# EAGLE board avoccado-nora2-test-jig-panel (EAGLE 7.2.0)
Avoccado-avr-yolandi Yolandi is the minified version of Avoccado-avr with less pins broken out and a footprint of less than one square inch for the PCB without peripherals.
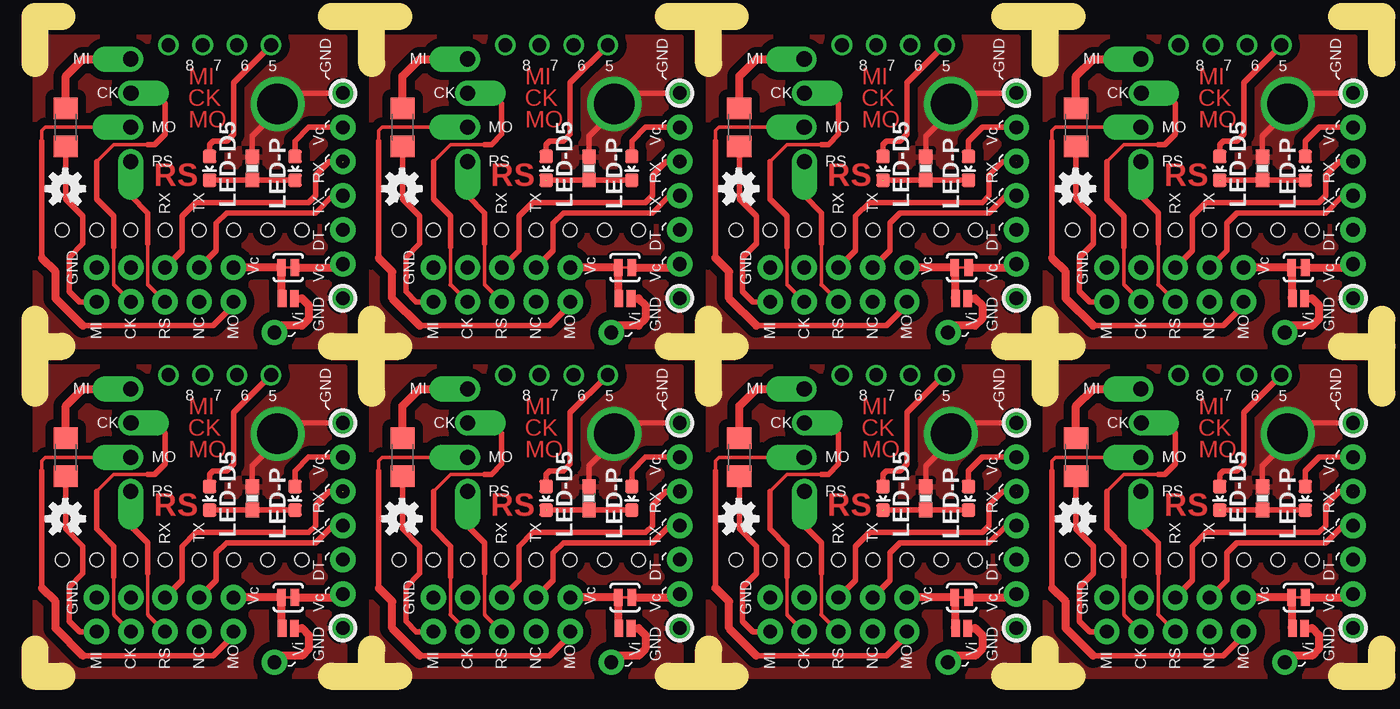
[diagram p0: board, top side]
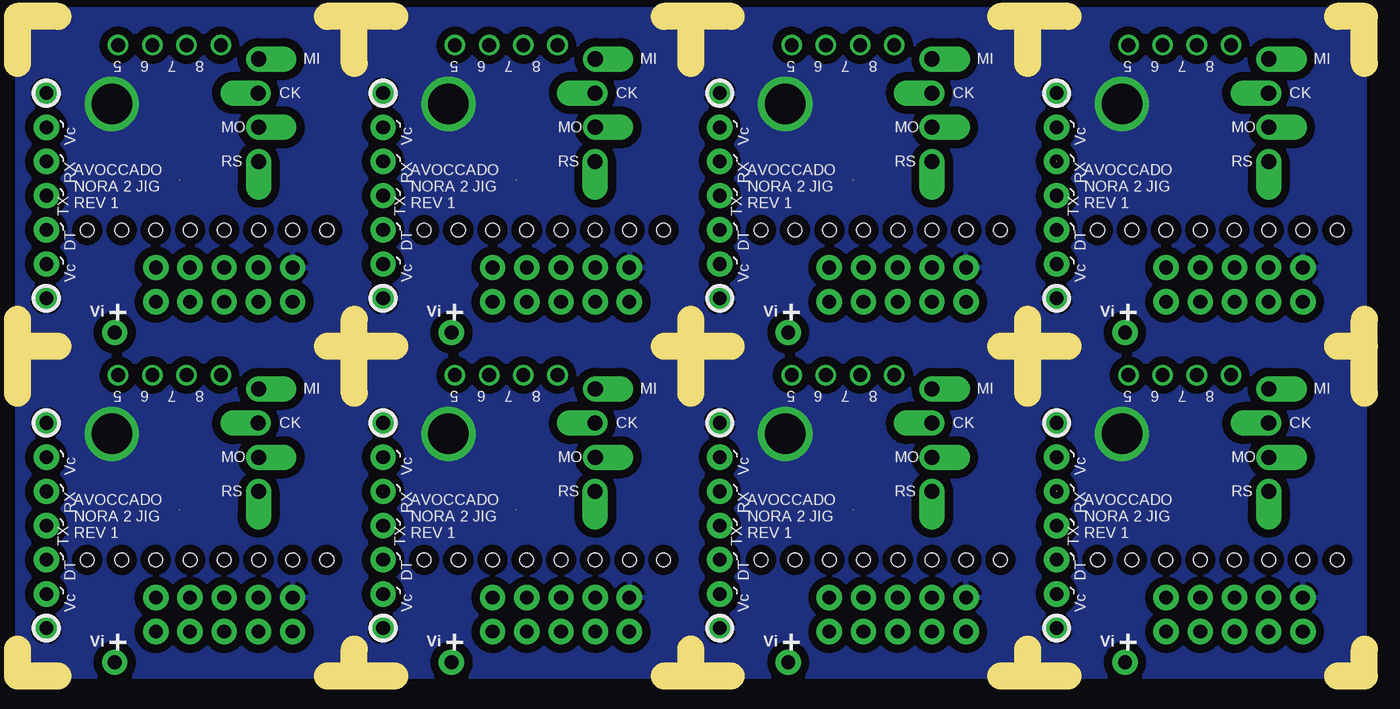
[diagram p1: board, bottom side, seen from below]

No outline drawn. Coordinates in mm, seen from the top.
Copper layers (1*16): Top 0.035mm / dielectric 1.5mm / Bottom 0.035mm
Design rules "dirt_cheap_dirty_boards.v1 *": minimum track width 5mil, minimum drill 12mil, track to track 5mil, track to pad 5mil, pad to pad 5mil, via to via 5mil, smd to smd 0mil, copper to edge 10mil, drill to drill 10mil, minimum pad ring 10mil, minimum via ring 6mil, stop-mask expansion 0mil, vias tented up to drill 25mil, thermal gap 10mil
Net classes: 1 vcc: width 0.254 mm; 3 usbvcc: width 0.203 mm, drill 0.61 mm, clearance 0.152 mm
Holes 1.02 mm at 4.57,8.64 7.11,8.64 9.65,8.64 12.19,8.64 14.73,8.64 17.27,8.64 19.81,8.64 2.03,8.64 4.57,33.14 7.11,33.14 9.65,33.14 12.19,33.14 14.73,33.14 17.27,33.14 19.81,33.14 2.03,33.14 29.57,8.64 32.11,8.64 34.65,8.64 37.19,8.64 39.73,8.64 42.27,8.64 44.81,8.64 27.03,8.64 29.57,33.14 32.11,33.14 34.65,33.14 37.19,33.14 39.73,33.14 42.27,33.14 44.81,33.14 27.03,33.14 54.57,8.64 57.11,8.64 59.65,8.64 62.19,8.64 64.73,8.64 67.27,8.64 69.81,8.64 52.03,8.64 54.57,33.14 57.11,33.14 59.65,33.14 62.19,33.14 64.73,33.14 67.27,33.14 69.81,33.14 52.03,33.14 79.57,8.64 82.11,8.64 84.65,8.64 87.19,8.64 89.73,8.64 92.27,8.64 94.81,8.64 77.03,8.64 79.57,33.14 82.11,33.14 84.65,33.14 87.19,33.14 89.73,33.14 92.27,33.14 94.81,33.14 77.03,33.14
tRestrict: area 3,3 to 14.7,7.1; area 7.1,9.1 to 12.7,21.3; area 12.7,19.8 to 14.7,21.3; area 1.5,3.6 to 5.1,15.7; area 3,27.5 to 14.7,31.6; area 7.1,33.6 to 12.7,45.8; area 12.7,44.3 to 14.7,45.8; area 1.5,28.1 to 5.1,40.2; area 28,3 to 39.7,7.1; area 32.1,9.1 to 37.7,21.3; area 37.7,19.8 to 39.7,21.3; area 26.5,3.6 to 30.1,15.7; 20 more areas
Milling: 64 lines

## Footprints (pad centres in the part's own frame; a part is rotated, then mirrored left to right if it is on the bottom)
LED-0603 = smd 1 x 1: A 0,-0.877; C 0,0.877
2X5_NOSILK = drill 1.016 pad 1.88: 1 -1.27,5.08; 2 1.27,5.08; 3 -1.27,2.54; 4 1.27,2.54; 5 -1.27,0; 6 1.27,0; 7 -1.27,-2.54; 8 1.27,-2.54; 9 -1.27,-5.08; 10 1.27,-5.08
1X01 = drill 1.016 pad 1.88: 1 0,0
1X01_OFFSET = drill 1.118 pad 1.88 offset: 1 0,0
1206 = smd 1.6 x 1.8: 1 -1.4,0; 2 1.4,0
0603-RES = smd 1.1 x 1: 1 -0.85,0; 2 0.85,0
PAD-JUMPER-2-NC_BY_TRACE_YES_SILK = smd 0.635 x 1.27: 1 -0.508,0; 2 0.508,0
PAD-JUMPER-2-NO_NO_SILK = smd 0.635 x 1.27: 1 -0.45,0; 2 0.45,0
1X01NS-KIT = drill 1.016 pad 1.524: 1 0,0

## Placement (x,y rotation side)
D5-LED  [LED-0603]  12.95,13.21 180 top
D5-LED1  [LED-0603]  12.95,37.71 180 top
D5-LED2  [LED-0603]  37.95,13.21 180 top
D5-LED3  [LED-0603]  37.95,37.71 180 top
D5-LED4  [LED-0603]  62.95,13.21 180 top
D5-LED5  [LED-0603]  62.95,37.71 180 top
D5-LED6  [LED-0603]  87.95,13.21 180 top
D5-LED7  [LED-0603]  87.95,37.71 180 top
ICSP  M05X2NO_SILK  [2X5_NOSILK]  9.65,4.57 90 bottom
ICSP1  M05X2NO_SILK  [2X5_NOSILK]  9.65,29.07 90 bottom
ICSP2  M05X2NO_SILK  [2X5_NOSILK]  34.65,4.57 90 bottom
ICSP3  M05X2NO_SILK  [2X5_NOSILK]  34.65,29.07 90 bottom
ICSP4  M05X2NO_SILK  [2X5_NOSILK]  59.65,4.57 90 bottom
ICSP5  M05X2NO_SILK  [2X5_NOSILK]  59.65,29.07 90 bottom
ICSP6  M05X2NO_SILK  [2X5_NOSILK]  84.65,4.57 90 bottom
ICSP7  M05X2NO_SILK  [2X5_NOSILK]  84.65,29.07 90 bottom
JP1  M01PTH  [1X01]  22.86,28.06 0 top
JP2  M01PTH  [1X01]  22.86,38.22 0 top
JP3  M01PTH  [1X01]  22.86,18.8 0 top
JP4  M01PTH  [1X01]  22.86,35.68 0 top
JP5  M01PTH  [1X01]  22.86,33.14 0 top
JP6  M01PTH  [1X01]  22.86,3.56 0 top
JP7  M01PTH  [1X01]  22.86,40.76 0 top
JP8  M01PTH  [1X01]  22.86,13.72 0 top
JP9  M01PTH  [1X01]  22.86,11.18 0 top
JP10  M01PTH  [1X01]  22.86,8.64 0 top
JP11  M01PTH  [1X01]  22.86,16.26 0 top
JP12  M01OFFSET  [1X01_OFFSET]  7.1,21.34 90 top
JP13  M01OFFSET  [1X01_OFFSET]  7.12,18.8 270 top
JP14  M01OFFSET  [1X01_OFFSET]  7.1,16.26 90 top
JP15  M01OFFSET  [1X01_OFFSET]  7.11,13.71 180 top
JP16  M01OFFSET  [1X01_OFFSET]  7.1,45.84 90 top
JP17  M01PTH  [1X01]  17.78,1.02 0 top
JP18  M01PTH  [1X01]  22.86,6.1 0 top
JP19  M01OFFSET  [1X01_OFFSET]  7.12,43.3 270 top
JP20  M01OFFSET  [1X01_OFFSET]  7.1,40.76 90 top
JP21  M01OFFSET  [1X01_OFFSET]  7.11,38.21 180 top
JP22  M01PTH  [1X01]  22.86,43.3 0 top
JP23  M01PTH  [1X01]  17.78,25.52 0 top
JP24  M01PTH  [1X01]  22.86,30.6 0 top
JP25  M01PTH  [1X01]  47.86,3.56 0 top
JP26  M01PTH  [1X01]  47.86,13.72 0 top
JP27  M01PTH  [1X01]  47.86,11.18 0 top
JP28  M01PTH  [1X01]  47.86,8.64 0 top
JP29  M01PTH  [1X01]  47.86,16.26 0 top
JP30  M01OFFSET  [1X01_OFFSET]  32.1,21.34 90 top
JP31  M01OFFSET  [1X01_OFFSET]  32.12,18.8 270 top
JP32  M01OFFSET  [1X01_OFFSET]  32.1,16.26 90 top
JP33  M01OFFSET  [1X01_OFFSET]  32.11,13.71 180 top
JP34  M01PTH  [1X01]  47.86,18.8 0 top
JP35  M01PTH  [1X01]  42.78,1.02 0 top
JP36  M01PTH  [1X01]  47.86,6.1 0 top
JP37  M01PTH  [1X01]  47.86,28.06 0 top
JP38  M01PTH  [1X01]  47.86,38.22 0 top
JP39  M01PTH  [1X01]  47.86,35.68 0 top
JP40  M01PTH  [1X01]  47.86,33.14 0 top
JP41  M01PTH  [1X01]  47.86,40.76 0 top
JP42  M01OFFSET  [1X01_OFFSET]  32.1,45.84 90 top
JP43  M01OFFSET  [1X01_OFFSET]  32.12,43.3 270 top
JP44  M01OFFSET  [1X01_OFFSET]  32.1,40.76 90 top
JP45  M01OFFSET  [1X01_OFFSET]  32.11,38.21 180 top
JP46  M01PTH  [1X01]  47.86,43.3 0 top
JP47  M01PTH  [1X01]  42.78,25.52 0 top
JP48  M01PTH  [1X01]  47.86,30.6 0 top
JP49  M01PTH  [1X01]  72.86,3.56 0 top
JP50  M01PTH  [1X01]  72.86,13.72 0 top
JP51  M01PTH  [1X01]  72.86,11.18 0 top
JP52  M01PTH  [1X01]  72.86,8.64 0 top
JP53  M01PTH  [1X01]  72.86,16.26 0 top
JP54  M01OFFSET  [1X01_OFFSET]  57.1,21.34 90 top
JP55  M01OFFSET  [1X01_OFFSET]  57.12,18.8 270 top
JP56  M01OFFSET  [1X01_OFFSET]  57.1,16.26 90 top
JP57  M01OFFSET  [1X01_OFFSET]  57.11,13.71 180 top
JP58  M01PTH  [1X01]  72.86,18.8 0 top
JP59  M01PTH  [1X01]  67.78,1.02 0 top
JP60  M01PTH  [1X01]  72.86,6.1 0 top
JP61  M01PTH  [1X01]  72.86,28.06 0 top
JP62  M01PTH  [1X01]  72.86,38.22 0 top
JP63  M01PTH  [1X01]  72.86,35.68 0 top
JP64  M01PTH  [1X01]  72.86,33.14 0 top
JP65  M01PTH  [1X01]  72.86,40.76 0 top
JP66  M01OFFSET  [1X01_OFFSET]  57.1,45.84 90 top
JP67  M01OFFSET  [1X01_OFFSET]  57.12,43.3 270 top
JP68  M01OFFSET  [1X01_OFFSET]  57.1,40.76 90 top
JP69  M01OFFSET  [1X01_OFFSET]  57.11,38.21 180 top
JP70  M01PTH  [1X01]  72.86,43.3 0 top
JP71  M01PTH  [1X01]  67.78,25.52 0 top
JP72  M01PTH  [1X01]  72.86,30.6 0 top
JP73  M01PTH  [1X01]  97.86,3.56 0 top
JP74  M01PTH  [1X01]  97.86,13.72 0 top
JP75  M01PTH  [1X01]  97.86,11.18 0 top
JP76  M01PTH  [1X01]  97.86,8.64 0 top
JP77  M01PTH  [1X01]  97.86,16.26 0 top
JP78  M01OFFSET  [1X01_OFFSET]  82.1,21.34 90 top
JP79  M01OFFSET  [1X01_OFFSET]  82.12,18.8 270 top
JP80  M01OFFSET  [1X01_OFFSET]  82.1,16.26 90 top
JP81  M01OFFSET  [1X01_OFFSET]  82.11,13.71 180 top
JP82  M01PTH  [1X01]  97.86,18.8 0 top
JP83  M01PTH  [1X01]  92.78,1.02 0 top
JP84  M01PTH  [1X01]  97.86,6.1 0 top
JP85  M01PTH  [1X01]  97.86,28.06 0 top
JP86  M01PTH  [1X01]  97.86,38.22 0 top
JP87  M01PTH  [1X01]  97.86,35.68 0 top
JP88  M01PTH  [1X01]  97.86,33.14 0 top
JP89  M01PTH  [1X01]  97.86,40.76 0 top
JP90  M01OFFSET  [1X01_OFFSET]  82.1,45.84 90 top
JP91  M01OFFSET  [1X01_OFFSET]  82.12,43.3 270 top
JP92  M01OFFSET  [1X01_OFFSET]  82.1,40.76 90 top
JP93  M01OFFSET  [1X01_OFFSET]  82.11,38.21 180 top
JP94  M01PTH  [1X01]  97.86,43.3 0 top
JP95  M01PTH  [1X01]  92.78,25.52 0 top
JP96  M01PTH  [1X01]  97.86,30.6 0 top
LOGO1  OSHW-LOGOS  [OSHW-LOGO-S]  2.25,36.19 0 top
LOGO2  OSHW-LOGOS  [OSHW-LOGO-S]  2.25,11.69 0 top
LOGO3  OSHW-LOGOS  [OSHW-LOGO-S]  27.25,11.69 0 top
LOGO4  OSHW-LOGOS  [OSHW-LOGO-S]  27.25,36.19 0 top
LOGO5  OSHW-LOGOS  [OSHW-LOGO-S]  52.25,11.69 0 top
LOGO6  OSHW-LOGOS  [OSHW-LOGO-S]  52.25,36.19 0 top
LOGO7  OSHW-LOGOS  [OSHW-LOGO-S]  77.25,11.69 0 top
LOGO8  OSHW-LOGOS  [OSHW-LOGO-S]  77.25,36.19 0 top
PWR-LED  [LED-0603]  19.3,13.21 180 top
PWR-LED1  [LED-0603]  19.3,37.71 180 top
PWR-LED2  [LED-0603]  44.3,13.21 180 top
PWR-LED3  [LED-0603]  44.3,37.71 180 top
PWR-LED4  [LED-0603]  69.3,13.21 180 top
PWR-LED5  [LED-0603]  69.3,37.71 180 top
PWR-LED6  [LED-0603]  94.3,13.21 180 top
PWR-LED7  [LED-0603]  94.3,37.71 180 top
R1  0  [1206]  2.29,16.26 270 top
R2  1K  [0603-RES]  16.13,13.21 90 top
R3  0  [1206]  2.29,40.76 270 top
R4  1K  [0603-RES]  16.13,37.71 90 top
R5  0  [1206]  27.29,16.26 270 top
R6  1K  [0603-RES]  41.13,13.21 90 top
R7  0  [1206]  27.29,40.76 270 top
R8  1K  [0603-RES]  41.13,37.71 90 top
R9  0  [1206]  52.29,16.26 270 top
R10  1K  [0603-RES]  66.13,13.21 90 top
R11  0  [1206]  52.29,40.76 270 top
R12  1K  [0603-RES]  66.13,37.71 90 top
R13  0  [1206]  77.29,16.26 270 top
R14  1K  [0603-RES]  91.13,13.21 90 top
R15  0  [1206]  77.29,40.76 270 top
R16  1K  [0603-RES]  91.13,37.71 90 top
SJ1  JUMPER-PAD-2-NC_BY_TRACE  [PAD-JUMPER-2-NC_BY_TRACE_YES_SILK]  18.8,5.84 180 top
SJ2  JUMPER-PAD-2-NO  [PAD-JUMPER-2-NO_NO_SILK]  18.8,3.56 180 top
SJ3  JUMPER-PAD-2-NC_BY_TRACE  [PAD-JUMPER-2-NC_BY_TRACE_YES_SILK]  18.8,30.34 180 top
SJ4  JUMPER-PAD-2-NO  [PAD-JUMPER-2-NO_NO_SILK]  18.8,28.06 180 top
SJ5  JUMPER-PAD-2-NC_BY_TRACE  [PAD-JUMPER-2-NC_BY_TRACE_YES_SILK]  43.8,5.84 180 top
SJ6  JUMPER-PAD-2-NO  [PAD-JUMPER-2-NO_NO_SILK]  43.8,3.56 180 top
SJ7  JUMPER-PAD-2-NC_BY_TRACE  [PAD-JUMPER-2-NC_BY_TRACE_YES_SILK]  43.8,30.34 180 top
SJ8  JUMPER-PAD-2-NO  [PAD-JUMPER-2-NO_NO_SILK]  43.8,28.06 180 top
SJ9  JUMPER-PAD-2-NC_BY_TRACE  [PAD-JUMPER-2-NC_BY_TRACE_YES_SILK]  68.8,5.84 180 top
SJ10  JUMPER-PAD-2-NO  [PAD-JUMPER-2-NO_NO_SILK]  68.8,3.56 180 top
SJ11  JUMPER-PAD-2-NC_BY_TRACE  [PAD-JUMPER-2-NC_BY_TRACE_YES_SILK]  68.8,30.34 180 top
SJ12  JUMPER-PAD-2-NO  [PAD-JUMPER-2-NO_NO_SILK]  68.8,28.06 180 top
SJ13  JUMPER-PAD-2-NC_BY_TRACE  [PAD-JUMPER-2-NC_BY_TRACE_YES_SILK]  93.8,5.84 180 top
SJ14  JUMPER-PAD-2-NO  [PAD-JUMPER-2-NO_NO_SILK]  93.8,3.56 180 top
SJ15  JUMPER-PAD-2-NC_BY_TRACE  [PAD-JUMPER-2-NC_BY_TRACE_YES_SILK]  93.8,30.34 180 top
SJ16  JUMPER-PAD-2-NO  [PAD-JUMPER-2-NO_NO_SILK]  93.8,28.06 180 top
TP1  M01NOSILK-KIT  [1X01NS-KIT]  17.53,22.36 270 top
TP2  M01NOSILK-KIT  [1X01NS-KIT]  17.53,46.86 270 top
TP3  M01NOSILK-KIT  [1X01NS-KIT]  14.99,46.86 270 top
TP4  M01NOSILK-KIT  [1X01NS-KIT]  12.45,46.86 270 top
TP5  M01NOSILK-KIT  [1X01NS-KIT]  9.91,46.86 270 top
TP6  M01NOSILK-KIT  [1X01NS-KIT]  14.99,22.36 270 top
TP7  M01NOSILK-KIT  [1X01NS-KIT]  12.45,22.36 270 top
TP8  M01NOSILK-KIT  [1X01NS-KIT]  9.91,22.36 270 top
TP9  M01NOSILK-KIT  [1X01NS-KIT]  42.53,22.36 270 top
TP10  M01NOSILK-KIT  [1X01NS-KIT]  39.99,22.36 270 top
TP11  M01NOSILK-KIT  [1X01NS-KIT]  37.45,22.36 270 top
TP12  M01NOSILK-KIT  [1X01NS-KIT]  34.91,22.36 270 top
TP13  M01NOSILK-KIT  [1X01NS-KIT]  42.53,46.86 270 top
TP14  M01NOSILK-KIT  [1X01NS-KIT]  39.99,46.86 270 top
TP15  M01NOSILK-KIT  [1X01NS-KIT]  37.45,46.86 270 top
TP16  M01NOSILK-KIT  [1X01NS-KIT]  34.91,46.86 270 top
TP17  M01NOSILK-KIT  [1X01NS-KIT]  67.53,22.36 270 top
TP18  M01NOSILK-KIT  [1X01NS-KIT]  64.99,22.36 270 top
TP19  M01NOSILK-KIT  [1X01NS-KIT]  62.45,22.36 270 top
TP20  M01NOSILK-KIT  [1X01NS-KIT]  59.91,22.36 270 top
TP21  M01NOSILK-KIT  [1X01NS-KIT]  67.53,46.86 270 top
TP22  M01NOSILK-KIT  [1X01NS-KIT]  64.99,46.86 270 top
TP23  M01NOSILK-KIT  [1X01NS-KIT]  62.45,46.86 270 top
TP24  M01NOSILK-KIT  [1X01NS-KIT]  59.91,46.86 270 top
TP25  M01NOSILK-KIT  [1X01NS-KIT]  92.53,22.36 270 top
TP26  M01NOSILK-KIT  [1X01NS-KIT]  89.99,22.36 270 top
TP27  M01NOSILK-KIT  [1X01NS-KIT]  87.45,22.36 270 top
TP28  M01NOSILK-KIT  [1X01NS-KIT]  84.91,22.36 270 top
TP29  M01NOSILK-KIT  [1X01NS-KIT]  92.53,46.86 270 top
TP30  M01NOSILK-KIT  [1X01NS-KIT]  89.99,46.86 270 top
TP31  M01NOSILK-KIT  [1X01NS-KIT]  87.45,46.86 270 top
TP32  M01NOSILK-KIT  [1X01NS-KIT]  84.91,46.86 270 top

## Library data of the parts
D5-LED D5-LED1-D5-LED7 PWR-LED PWR-LED1-PWR-LED7 = SparkFun-LED
ICSP ICSP1-ICSP7 JP1-JP96 TP1-TP32 = SparkFun-Connectors
LOGO1-LOGO8 = SparkFun-Aesthetics
R1 R3 R5 R7 R9 R11 R13 R15 SJ1-SJ16 = SparkFun-Passives
R2 R4 R6 R8 R10 R12 R14 R16 = SparkFun-Resistors

## Nets
3.3V: JP18.1 SJ1.1
3.3V1: JP24.1 SJ3.1
3.3V2: JP36.1 SJ5.1
3.3V3: JP48.1 SJ7.1
3.3V4: JP60.1 SJ9.1
3.3V5: JP72.1 SJ11.1
3.3V6: JP84.1 SJ13.1
3.3V7: JP96.1 SJ15.1
5V: JP17.1 SJ2.1
5V1: JP23.1 SJ4.1
5V2: JP35.1 SJ6.1
5V3: JP47.1 SJ8.1
5V4: JP59.1 SJ10.1
5V5: JP71.1 SJ12.1
5V6: JP83.1 SJ14.1
5V7: JP95.1 SJ16.1
D1: TP5.1
D2: D5-LED1.A TP2.1
D3: TP3.1
D4: TP4.1
D5: D5-LED.A TP1.1
D6: TP6.1
D7: TP7.1
D8: TP8.1
D9: TP12.1
D10: D5-LED2.A TP9.1
D11: TP10.1
D12: TP11.1
D13: TP16.1
D14: D5-LED3.A TP13.1
D15: TP14.1
D16: TP15.1
D17: TP20.1
D18: D5-LED4.A TP17.1
D19: TP18.1
D20: TP19.1
D21: TP24.1
D22: D5-LED5.A TP21.1
D23: TP22.1
D24: TP23.1
D25: TP28.1
D26: D5-LED6.A TP25.1
D27: TP26.1
D28: TP27.1
D29: TP32.1
D30: D5-LED7.A TP29.1
D31: TP30.1
D32: TP31.1
DTR: JP10.1
DTR1: JP5.1
DTR2: JP28.1
DTR3: JP40.1
DTR4: JP52.1
DTR5: JP64.1
DTR6: JP76.1
DTR7: JP88.1
GND [vcc]: ICSP.10 JP3.1 JP6.1 R2.2
GND1 [vcc]: ICSP1.10 JP1.1 JP22.1 R4.2
GND2 [vcc]: ICSP2.10 JP25.1 JP34.1 R6.2
GND3 [vcc]: ICSP3.10 JP37.1 JP46.1 R8.2
GND4 [vcc]: ICSP4.10 JP49.1 JP58.1 R10.2
GND5 [vcc]: ICSP5.10 JP61.1 JP70.1 R12.2
GND6 [vcc]: ICSP6.10 JP73.1 JP82.1 R14.2
GND7 [vcc]: ICSP7.10 JP85.1 JP94.1 R16.2
MISO: JP12.1 R1.1
MISO1: ICSP.9 R1.2
MISO2: JP16.1 R3.1
MISO3: ICSP1.9 R3.2
MISO4: JP30.1 R5.1
MISO5: ICSP2.9 R5.2
MISO6: JP42.1 R7.1
MISO7: ICSP3.9 R7.2
MISO8: JP54.1 R9.1
MISO9: ICSP4.9 R9.2
MISO10: JP66.1 R11.1
MISO11: ICSP5.9 R11.2
MISO12: JP78.1 R13.1
MISO13: ICSP6.9 R13.2
MISO14: JP90.1 R15.1
MISO15: ICSP7.9 R15.2
MOSI: ICSP.1 JP14.1
MOSI1: ICSP1.1 JP20.1
MOSI2: ICSP2.1 JP32.1
MOSI3: ICSP3.1 JP44.1
MOSI4: ICSP4.1 JP56.1
MOSI5: ICSP5.1 JP68.1
MOSI6: ICSP6.1 JP80.1
MOSI7: ICSP7.1 JP92.1
N$1: D5-LED.C PWR-LED.C R2.1
N$2: JP11.1 PWR-LED.A
N$3: D5-LED1.C PWR-LED1.C R4.1
N$4: JP7.1 PWR-LED1.A
N$5: D5-LED2.C PWR-LED2.C R6.1
N$6: JP29.1 PWR-LED2.A
N$7: D5-LED3.C PWR-LED3.C R8.1
N$8: JP41.1 PWR-LED3.A
N$9: D5-LED4.C PWR-LED4.C R10.1
N$10: JP53.1 PWR-LED4.A
N$11: D5-LED5.C PWR-LED5.C R12.1
N$12: JP65.1 PWR-LED5.A
N$13: D5-LED6.C PWR-LED6.C R14.1
N$14: JP77.1 PWR-LED6.A
N$15: D5-LED7.C PWR-LED7.C R16.1
N$16: JP89.1 PWR-LED7.A
RESET: ICSP.5 JP15.1
RESET1: ICSP1.5 JP21.1
RESET2: ICSP2.5 JP33.1
RESET3: ICSP3.5 JP45.1
RESET4: ICSP4.5 JP57.1
RESET5: ICSP5.5 JP69.1
RESET6: ICSP6.5 JP81.1
RESET7: ICSP7.5 JP93.1
RXI: ICSP.6 JP8.1
RXI1: ICSP1.6 JP2.1
RXI2: ICSP2.6 JP26.1
RXI3: ICSP3.6 JP38.1
RXI4: ICSP4.6 JP50.1
RXI5: ICSP5.6 JP62.1
RXI6: ICSP6.6 JP74.1
RXI7: ICSP7.6 JP86.1
SCK: ICSP.7 JP13.1
SCK1: ICSP1.7 JP19.1
SCK2: ICSP2.7 JP31.1
SCK3: ICSP3.7 JP43.1
SCK4: ICSP4.7 JP55.1
SCK5: ICSP5.7 JP67.1
SCK6: ICSP6.7 JP79.1
SCK7: ICSP7.7 JP91.1
TXO: ICSP.4 JP9.1
TXO1: ICSP1.4 JP4.1
TXO2: ICSP2.4 JP27.1
TXO3: ICSP3.4 JP39.1
TXO4: ICSP4.4 JP51.1
TXO5: ICSP5.4 JP63.1
TXO6: ICSP6.4 JP75.1
TXO7: ICSP7.4 JP87.1
VTG: ICSP.2 SJ1.2 SJ2.2
VTG1: ICSP1.2 SJ3.2 SJ4.2
VTG2: ICSP2.2 SJ5.2 SJ6.2
VTG3: ICSP3.2 SJ7.2 SJ8.2
VTG4: ICSP4.2 SJ9.2 SJ10.2
VTG5: ICSP5.2 SJ11.2 SJ12.2
VTG6: ICSP6.2 SJ13.2 SJ14.2
VTG7: ICSP7.2 SJ15.2 SJ16.2

## Tracks (layer width: path | path; a pad name or v marks a point on that pad's centre or on a via)
3.3V
  Top 0.61: SJ1.1 22.6,5.84 JP18.1
3.3V1
  Top 0.61: SJ3.1 22.6,30.34 JP24.1
3.3V2
  Top 0.61: SJ5.1 47.6,5.84 JP36.1
3.3V3
  Top 0.61: SJ7.1 47.6,30.34 JP48.1
3.3V4
  Top 0.61: SJ9.1 72.6,5.84 JP60.1
3.3V5
  Top 0.61: SJ11.1 72.6,30.34 JP72.1
3.3V6
  Top 0.61: SJ13.1 97.6,5.84 JP84.1
3.3V7
  Top 0.61: SJ15.1 97.6,30.34 JP96.1
5V
  Top 0.61: SJ2.1 19.81,3.56 20.32,3.05 20.32,2.03 19.81,1.52 18.28,1.52 JP17.1
5V1
  Top 0.61: SJ4.1 19.81,28.06 20.32,27.55 20.32,26.53 19.81,26.02 18.28,26.02 JP23.1
5V2
  Top 0.61: SJ6.1 44.81,3.56 45.32,3.05 45.32,2.03 44.81,1.52 43.28,1.52 JP35.1
5V3
  Top 0.61: SJ8.1 44.81,28.06 45.32,27.55 45.32,26.53 44.81,26.02 43.28,26.02 JP47.1
5V4
  Top 0.61: SJ10.1 69.81,3.56 70.32,3.05 70.32,2.03 69.81,1.52 68.28,1.52 JP59.1
5V5
  Top 0.61: SJ12.1 69.81,28.06 70.32,27.55 70.32,26.53 69.81,26.02 68.28,26.02 JP71.1
5V6
  Top 0.61: SJ14.1 94.81,3.56 95.32,3.05 95.32,2.03 94.81,1.52 93.28,1.52 JP83.1
5V7
  Top 0.61: SJ16.1 94.81,28.06 95.32,27.55 95.32,26.53 94.81,26.02 93.28,26.02 JP95.1
D2
  Top 0.406: D5-LED1.A 12.95,39.49 13.21,39.74 14.22,39.74 14.73,40.25 14.73,44.07 TP2.1
D5
  Top 0.406: D5-LED.A 12.95,14.99 13.21,15.24 14.22,15.24 14.73,15.75 14.73,19.57 TP1.1
D10
  Top 0.406: D5-LED2.A 37.95,14.99 38.21,15.24 39.22,15.24 39.73,15.75 39.73,19.57 TP9.1
D14
  Top 0.406: D5-LED3.A 37.95,39.49 38.21,39.74 39.22,39.74 39.73,40.25 39.73,44.07 TP13.1
D18
  Top 0.406: D5-LED4.A 62.95,14.99 63.21,15.24 64.22,15.24 64.73,15.75 64.73,19.57 TP17.1
D22
  Top 0.406: D5-LED5.A 62.95,39.49 63.21,39.74 64.22,39.74 64.73,40.25 64.73,44.07 TP21.1
D26
  Top 0.406: D5-LED6.A 87.95,14.99 88.21,15.24 89.22,15.24 89.73,15.75 89.73,19.57 TP25.1
D30
  Top 0.406: D5-LED7.A 87.95,39.49 88.21,39.74 89.22,39.74 89.73,40.25 89.73,44.07 TP29.1
GND  (via drill 3 pad 4)
  Top 0.406: R2.2 16.13,15.62 19.3,18.8 JP3.1
  other vias: 18,18
  pour Bottom (isolate 0.61): 0.4,23.02 21,23 22.5,21.5 22.5,1 0.4,1
  pour Top (isolate 0.61): 0,0 0,22.97 22.97,22.97 22.97,0
  pour Bottom (isolate 0.61): 25,0 25,25 0,25 0,0
GND1  (via drill 3 pad 4)
  Top 0.406: R4.2 16.13,40.12 19.3,43.3 JP22.1
  other vias: 18,42.5
  pour Bottom (isolate 0.61): 0.4,47.52 21,47.5 22.5,46 22.5,25.5 0.4,25.5
  pour Top (isolate 0.61): 0,24.5 0,47.47 22.97,47.47 22.97,24.5
  pour Bottom (isolate 0.61): 25,24.5 25,49.5 0,49.5 0,24.5
GND2  (via drill 3 pad 4)
  Top 0.406: R6.2 41.13,15.62 44.3,18.8 JP34.1
  other vias: 43,18
  pour Bottom (isolate 0.61): 25.4,23.02 46,23 47.5,21.5 47.5,1 25.4,1
  pour Top (isolate 0.61): 25,0 25,22.97 47.97,22.97 47.97,0
  pour Bottom (isolate 0.61): 50,0 50,25 25,25 25,0
GND3  (via drill 3 pad 4)
  Top 0.406: R8.2 41.13,40.12 44.3,43.3 JP46.1
  other vias: 43,42.5
  pour Bottom (isolate 0.61): 25.4,47.52 46,47.5 47.5,46 47.5,25.5 25.4,25.5
  pour Top (isolate 0.61): 25,24.5 25,47.47 47.97,47.47 47.97,24.5
  pour Bottom (isolate 0.61): 50,24.5 50,49.5 25,49.5 25,24.5
GND4  (via drill 3 pad 4)
  Top 0.406: R10.2 66.13,15.62 69.3,18.8 JP58.1
  other vias: 68,18
  pour Bottom (isolate 0.61): 50.4,23.02 71,23 72.5,21.5 72.5,1 50.4,1
  pour Top (isolate 0.61): 50,0 50,22.97 72.97,22.97 72.97,0
  pour Bottom (isolate 0.61): 75,0 75,25 50,25 50,0
GND5  (via drill 3 pad 4)
  Top 0.406: R12.2 66.13,40.12 69.3,43.3 JP70.1
  other vias: 68,42.5
  pour Bottom (isolate 0.61): 50.4,47.52 71,47.5 72.5,46 72.5,25.5 50.4,25.5
  pour Top (isolate 0.61): 50,24.5 50,47.47 72.97,47.47 72.97,24.5
  pour Bottom (isolate 0.61): 75,24.5 75,49.5 50,49.5 50,24.5
GND6  (via drill 3 pad 4)
  Top 0.406: R14.2 91.13,15.62 94.3,18.8 JP82.1
  other vias: 93,18
  pour Bottom (isolate 0.61): 75.4,23.02 96,23 97.5,21.5 97.5,1 75.4,1
  pour Top (isolate 0.61): 75,0 75,22.97 97.97,22.97 97.97,0
  pour Bottom (isolate 0.61): 100,0 100,25 75,25 75,0
GND7  (via drill 3 pad 4)
  Top 0.406: R16.2 91.13,40.12 94.3,43.3 JP94.1
  other vias: 93,42.5
  pour Bottom (isolate 0.61): 75.4,47.52 96,47.5 97.5,46 97.5,25.5 75.4,25.5
  pour Top (isolate 0.61): 75,24.5 75,47.47 97.97,47.47 97.97,24.5
  pour Bottom (isolate 0.61): 100,24.5 100,49.5 75,49.5 75,24.5
MISO
  Top 0.61: JP12.1 5.59,21.34 5.08,21.34 3.56,21.34 2.29,20.07 R1.1
MISO1
  Top 0.406: ICSP.9 3.3,3.3 2.54,4.06 2.54,6.6 3.56,7.62 3.56,9.65 2.29,10.92 R1.2
MISO2
  Top 0.61: JP16.1 5.59,45.84 5.08,45.84 3.56,45.84 2.29,44.57 R3.1
MISO3
  Top 0.406: ICSP1.9 3.3,27.8 2.54,28.56 2.54,31.1 3.56,32.12 3.56,34.15 2.29,35.42 R3.2
MISO4
  Top 0.61: JP30.1 30.59,21.34 30.08,21.34 28.56,21.34 27.29,20.07 R5.1
MISO5
  Top 0.406: ICSP2.9 28.3,3.3 27.54,4.06 27.54,6.6 28.56,7.62 28.56,9.65 27.29,10.92 R5.2
MISO6
  Top 0.61: JP42.1 30.59,45.84 30.08,45.84 28.56,45.84 27.29,44.57 R7.1
MISO7
  Top 0.406: ICSP3.9 28.3,27.8 27.54,28.56 27.54,31.1 28.56,32.12 28.56,34.15 27.29,35.42 R7.2
MISO8
  Top 0.61: JP54.1 55.59,21.34 55.08,21.34 53.56,21.34 52.29,20.07 R9.1
MISO9
  Top 0.406: ICSP4.9 53.3,3.3 52.54,4.06 52.54,6.6 53.56,7.62 53.56,9.65 52.29,10.92 R9.2
MISO10
  Top 0.61: JP66.1 55.59,45.84 55.08,45.84 53.56,45.84 52.29,44.57 R11.1
MISO11
  Top 0.406: ICSP5.9 53.3,27.8 52.54,28.56 52.54,31.1 53.56,32.12 53.56,34.15 52.29,35.42 R11.2
MISO12
  Top 0.61: JP78.1 80.59,21.34 80.08,21.34 78.56,21.34 77.29,20.07 R13.1
MISO13
  Top 0.406: ICSP6.9 78.3,3.3 77.54,4.06 77.54,6.6 78.56,7.62 78.56,9.65 77.29,10.92 R13.2
MISO14
  Top 0.61: JP90.1 80.59,45.84 80.08,45.84 78.56,45.84 77.29,44.57 R15.1
MISO15
  Top 0.406: ICSP7.9 78.3,27.8 77.54,28.56 77.54,31.1 78.56,32.12 78.56,34.15 77.29,35.42 R15.2
MOSI
  Top 0.254: 5.08,16.26 0.76,16.26 0.51,16 0.51,15.24
  Top 0.406: ICSP.1 14.73,3.05 13.21,1.52 3.56,1.52 | 0.51,6.56 0.51,15.24 | 5.08,16.26 JP14.1
  Top 0.61: 0.51,6.56 1.52,5.54 1.52,3.56 3.56,1.52
MOSI1
  Top 0.254: 5.08,40.76 0.76,40.76 0.51,40.5 0.51,39.74
  Top 0.406: ICSP1.1 14.73,27.55 13.21,26.02 3.56,26.02 | 0.51,31.06 0.51,39.74 | 5.08,40.76 JP20.1
  Top 0.61: 0.51,31.06 1.52,30.04 1.52,28.06 3.56,26.02
MOSI2
  Top 0.254: 30.08,16.26 25.76,16.26 25.51,16 25.51,15.24
  Top 0.406: ICSP2.1 39.73,3.05 38.21,1.52 28.56,1.52 | 25.51,6.56 25.51,15.24 | 30.08,16.26 JP32.1
  Top 0.61: 25.51,6.56 26.52,5.54 26.52,3.56 28.56,1.52
MOSI3
  Top 0.254: 30.08,40.76 25.76,40.76 25.51,40.5 25.51,39.74
  Top 0.406: ICSP3.1 39.73,27.55 38.21,26.02 28.56,26.02 | 25.51,31.06 25.51,39.74 | 30.08,40.76 JP44.1
  Top 0.61: 25.51,31.06 26.52,30.04 26.52,28.06 28.56,26.02
MOSI4
  Top 0.254: 55.08,16.26 50.76,16.26 50.51,16 50.51,15.24
  Top 0.406: ICSP4.1 64.73,3.05 63.21,1.52 53.56,1.52 | 50.51,6.56 50.51,15.24 | 55.08,16.26 JP56.1
  Top 0.61: 50.51,6.56 51.52,5.54 51.52,3.56 53.56,1.52
MOSI5
  Top 0.254: 55.08,40.76 50.76,40.76 50.51,40.5 50.51,39.74
  Top 0.406: ICSP5.1 64.73,27.55 63.21,26.02 53.56,26.02 | 50.51,31.06 50.51,39.74 | 55.08,40.76 JP68.1
  Top 0.61: 50.51,31.06 51.52,30.04 51.52,28.06 53.56,26.02
MOSI6
  Top 0.254: 80.08,16.26 75.76,16.26 75.51,16 75.51,15.24
  Top 0.406: ICSP6.1 89.73,3.05 88.21,1.52 78.56,1.52 | 75.51,6.56 75.51,15.24 | 80.08,16.26 JP80.1
  Top 0.61: 75.51,6.56 76.52,5.54 76.52,3.56 78.56,1.52
MOSI7
  Top 0.254: 80.08,40.76 75.76,40.76 75.51,40.5 75.51,39.74
  Top 0.406: ICSP7.1 89.73,27.55 88.21,26.02 78.56,26.02 | 75.51,31.06 75.51,39.74 | 80.08,40.76 JP92.1
  Top 0.61: 75.51,31.06 76.52,30.04 76.52,28.06 78.56,26.02
N$1  (1 unrouted)
  Top 0.406: 12.98,12.33 R2.1 | D5-LED.C PWR-LED.C
N$2
  Top 0.406: JP11.1 20.33,16.26 19.3,15.24 PWR-LED.A
N$3  (1 unrouted)
  Top 0.406: 12.98,36.83 R4.1 | D5-LED1.C PWR-LED1.C
N$4
  Top 0.406: JP7.1 20.33,40.76 19.3,39.74 PWR-LED1.A
N$5  (1 unrouted)
  Top 0.406: 37.98,12.33 R6.1 | D5-LED2.C PWR-LED2.C
N$6
  Top 0.406: JP29.1 45.33,16.26 44.3,15.24 PWR-LED2.A
N$7  (1 unrouted)
  Top 0.406: 37.98,36.83 R8.1 | D5-LED3.C PWR-LED3.C
N$8
  Top 0.406: JP41.1 45.33,40.76 44.3,39.74 PWR-LED3.A
N$9  (1 unrouted)
  Top 0.406: 62.98,12.33 R10.1 | D5-LED4.C PWR-LED4.C
N$10
  Top 0.406: JP53.1 70.33,16.26 69.3,15.24 PWR-LED4.A
N$11  (1 unrouted)
  Top 0.406: 62.98,36.83 R12.1 | D5-LED5.C PWR-LED5.C
N$12
  Top 0.406: JP65.1 70.33,40.76 69.3,39.74 PWR-LED5.A
N$13  (1 unrouted)
  Top 0.406: 87.98,12.33 R14.1 | D5-LED6.C PWR-LED6.C
N$14
  Top 0.406: JP77.1 95.33,16.26 94.3,15.24 PWR-LED6.A
N$15  (1 unrouted)
  Top 0.406: 87.98,36.83 R16.1 | D5-LED7.C PWR-LED7.C
N$16
  Top 0.406: JP89.1 95.33,40.76 94.3,39.74 PWR-LED7.A
RESET
  Top 0.254: 8.38,7.62 8.38,4.57
  Top 0.305: JP15.1 | 8.38,4.57 ICSP.5
  Top 0.406: 8.38,7.62 8.38,9.91 7.11,11.18 JP15.1
RESET1
  Top 0.254: 8.38,32.12 8.38,29.07
  Top 0.305: JP21.1 | 8.38,29.07 ICSP1.5
  Top 0.406: 8.38,32.12 8.38,34.41 7.11,35.68 JP21.1
RESET2
  Top 0.254: 33.38,7.62 33.38,4.57
  Top 0.305: JP33.1 | 33.38,4.57 ICSP2.5
  Top 0.406: 33.38,7.62 33.38,9.91 32.11,11.18 JP33.1
RESET3
  Top 0.254: 33.38,32.12 33.38,29.07
  Top 0.305: JP45.1 | 33.38,29.07 ICSP3.5
  Top 0.406: 33.38,32.12 33.38,34.41 32.11,35.68 JP45.1
RESET4
  Top 0.254: 58.38,7.62 58.38,4.57
  Top 0.305: JP57.1 | 58.38,4.57 ICSP4.5
  Top 0.406: 58.38,7.62 58.38,9.91 57.11,11.18 JP57.1
RESET5
  Top 0.254: 58.38,32.12 58.38,29.07
  Top 0.305: JP69.1 | 58.38,29.07 ICSP5.5
  Top 0.406: 58.38,32.12 58.38,34.41 57.11,35.68 JP69.1
RESET6
  Top 0.254: 83.38,7.62 83.38,4.57
  Top 0.305: JP81.1 | 83.38,4.57 ICSP6.5
  Top 0.406: 83.38,7.62 83.38,9.91 82.11,11.18 JP81.1
RESET7
  Top 0.254: 83.38,32.12 83.38,29.07
  Top 0.305: JP93.1 | 83.38,29.07 ICSP7.5
  Top 0.406: 83.38,32.12 83.38,34.41 82.11,35.68 JP93.1
RXI  (1 unrouted)
  Top 0.406: JP8.1 21.84,13.72 20.83,12.7 20.83,11.18 20.32,10.67 11.94,10.67 10.92,9.65 10.92,7.11 ICSP.6
RXI1  (1 unrouted)
  Top 0.406: JP2.1 21.84,38.22 20.83,37.2 20.83,35.68 20.32,35.17 11.94,35.17 10.92,34.15 10.92,31.61 ICSP1.6
RXI2  (1 unrouted)
  Top 0.406: JP26.1 46.84,13.72 45.83,12.7 45.83,11.18 45.32,10.67 36.94,10.67 35.92,9.65 35.92,7.11 ICSP2.6
RXI3  (1 unrouted)
  Top 0.406: JP38.1 46.84,38.22 45.83,37.2 45.83,35.68 45.32,35.17 36.94,35.17 35.92,34.15 35.92,31.61 ICSP3.6
RXI4  (1 unrouted)
  Top 0.406: JP50.1 71.84,13.72 70.83,12.7 70.83,11.18 70.32,10.67 61.94,10.67 60.92,9.65 60.92,7.11 ICSP4.6
RXI5  (1 unrouted)
  Top 0.406: JP62.1 71.84,38.22 70.83,37.2 70.83,35.68 70.32,35.17 61.94,35.17 60.92,34.15 60.92,31.61 ICSP5.6
RXI6  (1 unrouted)
  Top 0.406: JP74.1 96.84,13.72 95.83,12.7 95.83,11.18 95.32,10.67 86.94,10.67 85.92,9.65 85.92,7.11 ICSP6.6
RXI7  (1 unrouted)
  Top 0.406: JP86.1 96.84,38.22 95.83,37.2 95.83,35.68 95.32,35.17 86.94,35.17 85.92,34.15 85.92,31.61 ICSP7.6
SCK
  Top 0.254: 5.84,4.57 5.84,7.37 | 8.38,14.99 5.84,14.99 4.57,13.72
  Top 0.305: 5.84,4.57 ICSP.7
  Top 0.406: JP13.1 8.89,18.8 9.65,18.03 9.65,15.75 8.89,14.99 8.38,14.99 | 4.57,13.72 4.57,10.92 5.84,9.65 5.84,7.37
SCK1
  Top 0.254: 5.84,29.07 5.84,31.87 | 8.38,39.49 5.84,39.49 4.57,38.22
  Top 0.305: 5.84,29.07 ICSP1.7
  Top 0.406: JP19.1 8.89,43.3 9.65,42.53 9.65,40.25 8.89,39.49 8.38,39.49 | 4.57,38.22 4.57,35.42 5.84,34.15 5.84,31.87
SCK2
  Top 0.254: 30.84,4.57 30.84,7.37 | 33.38,14.99 30.84,14.99 29.57,13.72
  Top 0.305: 30.84,4.57 ICSP2.7
  Top 0.406: JP31.1 33.89,18.8 34.65,18.03 34.65,15.75 33.89,14.99 33.38,14.99 | 29.57,13.72 29.57,10.92 30.84,9.65 30.84,7.37
SCK3
  Top 0.254: 30.84,29.07 30.84,31.87 | 33.38,39.49 30.84,39.49 29.57,38.22
  Top 0.305: 30.84,29.07 ICSP3.7
  Top 0.406: JP43.1 33.89,43.3 34.65,42.53 34.65,40.25 33.89,39.49 33.38,39.49 | 29.57,38.22 29.57,35.42 30.84,34.15 30.84,31.87
SCK4
  Top 0.254: 55.84,4.57 55.84,7.37 | 58.38,14.99 55.84,14.99 54.57,13.72
  Top 0.305: 55.84,4.57 ICSP4.7
  Top 0.406: JP55.1 58.89,18.8 59.65,18.03 59.65,15.75 58.89,14.99 58.38,14.99 | 54.57,13.72 54.57,10.92 55.84,9.65 55.84,7.37
SCK5
  Top 0.254: 55.84,29.07 55.84,31.87 | 58.38,39.49 55.84,39.49 54.57,38.22
  Top 0.305: 55.84,29.07 ICSP5.7
  Top 0.406: JP67.1 58.89,43.3 59.65,42.53 59.65,40.25 58.89,39.49 58.38,39.49 | 54.57,38.22 54.57,35.42 55.84,34.15 55.84,31.87
SCK6
  Top 0.254: 80.84,4.57 80.84,7.37 | 83.38,14.99 80.84,14.99 79.57,13.72
  Top 0.305: 80.84,4.57 ICSP6.7
  Top 0.406: JP79.1 83.89,18.8 84.65,18.03 84.65,15.75 83.89,14.99 83.38,14.99 | 79.57,13.72 79.57,10.92 80.84,9.65 80.84,7.37
SCK7
  Top 0.254: 80.84,29.07 80.84,31.87 | 83.38,39.49 80.84,39.49 79.57,38.22
  Top 0.305: 80.84,29.07 ICSP7.7
  Top 0.406: JP91.1 83.89,43.3 84.65,42.53 84.65,40.25 83.89,39.49 83.38,39.49 | 79.57,38.22 79.57,35.42 80.84,34.15 80.84,31.87
TXO
  Top 0.406: JP9.1 22.1,11.18 20.83,9.91 14.22,9.91 13.46,9.14 13.46,7.11 ICSP.4
TXO1
  Top 0.406: JP4.1 22.1,35.68 20.83,34.41 14.22,34.41 13.46,33.64 13.46,31.61 ICSP1.4
TXO2
  Top 0.406: JP27.1 47.1,11.18 45.83,9.91 39.22,9.91 38.46,9.14 38.46,7.11 ICSP2.4
TXO3
  Top 0.406: JP39.1 47.1,35.68 45.83,34.41 39.22,34.41 38.46,33.64 38.46,31.61 ICSP3.4
TXO4
  Top 0.406: JP51.1 72.1,11.18 70.83,9.91 64.22,9.91 63.46,9.14 63.46,7.11 ICSP4.4
TXO5
  Top 0.406: JP63.1 72.1,35.68 70.83,34.41 64.22,34.41 63.46,33.64 63.46,31.61 ICSP5.4
TXO6
  Top 0.406: JP75.1 97.1,11.18 95.83,9.91 89.22,9.91 88.46,9.14 88.46,7.11 ICSP6.4
TXO7
  Top 0.406: JP87.1 97.1,35.68 95.83,34.41 89.22,34.41 88.46,33.64 88.46,31.61 ICSP7.4
VTG
  Top 0.61: SJ2.2 18.29,3.61 SJ1.2 ICSP.2
VTG1
  Top 0.61: SJ4.2 18.29,28.11 SJ3.2 ICSP1.2
VTG2
  Top 0.61: SJ6.2 43.29,3.61 SJ5.2 ICSP2.2
VTG3
  Top 0.61: SJ8.2 43.29,28.11 SJ7.2 ICSP3.2
VTG4
  Top 0.61: SJ10.2 68.29,3.61 SJ9.2 ICSP4.2
VTG5
  Top 0.61: SJ12.2 68.29,28.11 SJ11.2 ICSP5.2
VTG6
  Top 0.61: SJ14.2 93.29,3.61 SJ13.2 ICSP6.2
VTG7
  Top 0.61: SJ16.2 93.29,28.11 SJ15.2 ICSP7.2

## Text on the board
Top: MI | MI | MI | MI | CK | CK | CK | CK | MO | MO | MO | MO | RS | RS | RS | RS | MI | MI | MI | MI | CK | CK | CK | CK | MO | MO | MO | MO | RS | RS | RS | RS
tPlace: GND | GND | GND | GND | MI | MI | MI | MI | 8 | 7 | 6 | 5 | 8 | 7 | 6 | 5 | 8 | 7 | 6 | 5 | 8 | 7 | 6 | 5 | CK | CK | CK | CK | MO | LED-D5 | Vc | MO | LED-D5 | Vc | MO | LED-D5 | Vc | MO | LED-D5 | Vc | LED-P | LED-P | LED-P | LED-P | RS | RX | RS | RX | RS | RX | RS | RX | RX | TX | TX | RX | TX | TX | RX | TX | TX | RX | TX | TX | DT | DT | DT | DT | GND | GND | GND | GND | Vc | Vc | Vc | Vc | Vc | Vc | Vc | Vc | GND | GND | GND | GND | Vi | Vi | Vi | Vi | MI | CK | RS | NC | MO | MI | CK | RS | NC | MO | MI | CK | RS | NC | MO | MI | CK | RS | NC | MO | GND | GND | GND | GND | MI | 8 | 7 | 6 | 5 | MI | 8 | 7 | 6 | 5 | MI | 8 | 7 | 6 | 5 | MI | 8 | 7 | 6 | 5 | CK | CK | CK | CK | LED-D5 | LED-D5 | LED-D5 | LED-D5 | MO | LED-P | Vc | MO | LED-P | Vc | MO | LED-P | Vc | MO | LED-P | Vc | RS | RX | RS | RX | RS | RX | RS | RX | RX | TX | TX | RX | TX | TX | RX | TX | TX | RX | TX | TX | DT | DT | DT | DT | GND | Vc | GND | Vc | GND | Vc | GND | Vc | Vc | Vc | Vc | Vc | GND | GND | GND | GND | Vi | Vi | Vi | Vi | MI | CK | RS | NC | MO | MI | CK | RS | NC | MO | MI | CK | RS | NC | MO | MI | CK | RS | NC | MO
bPlace: MI | MI | MI | MI | 8 | 7 | 6 | 5 | 8 | 7 | 6 | 5 | 8 | 7 | 6 | 5 | 8 | 7 | 6 | 5 | CK | CK | CK | CK | MO | Vc | MO | Vc | MO | Vc | MO | Vc | RS | AVOCCADO / NORA 2 JIG / REV 1 | RX | RS | AVOCCADO / NORA 2 JIG / REV 1 | RX | RS | AVOCCADO / NORA 2 JIG / REV 1 | RX | RS | AVOCCADO / NORA 2 JIG / REV 1 | RX | TX | TX | TX | TX | DT | DT | DT | DT | Vc | Vc | Vc | Vc | + | Vi | + | Vi | + | Vi | + | Vi | MI | 8 | 7 | 6 | 5 | MI | 8 | 7 | 6 | 5 | MI | 8 | 7 | 6 | 5 | MI | 8 | 7 | 6 | 5 | CK | CK | CK | CK | MO | Vc | MO | Vc | MO | Vc | MO | Vc | RS | RX | RS | RX | RS | RX | RS | RX | AVOCCADO / NORA 2 JIG / REV 1 | AVOCCADO / NORA 2 JIG / REV 1 | AVOCCADO / NORA 2 JIG / REV 1 | AVOCCADO / NORA 2 JIG / REV 1 | TX | TX | TX | TX | DT | DT | DT | DT | Vc | Vc | Vc | Vc | + | Vi | + | Vi | + | Vi | + | Vi